# Altium PCB BenchTopPCB.PcbDoc
Units mil, origin at the board's own origin, x right, y up, seen from the top; angles counter-clockwise.
Board outline 3031.43 x 1027.42 mil, 2 copper layers (Top Layer, Bottom Layer), stack 61.8 mil thick; 20 components, 14 nets, 57 pads, 0 vias.
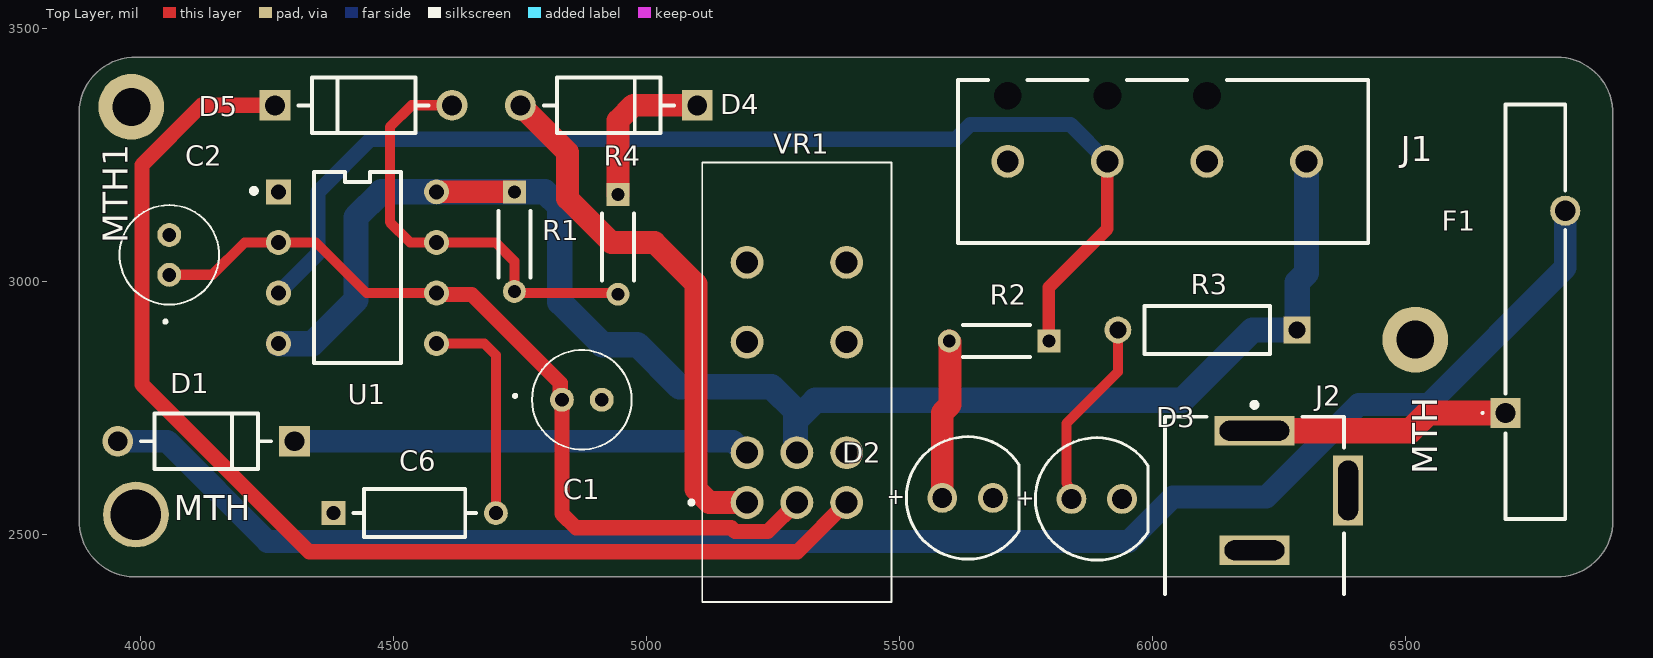
[diagram p0: Top Layer view]
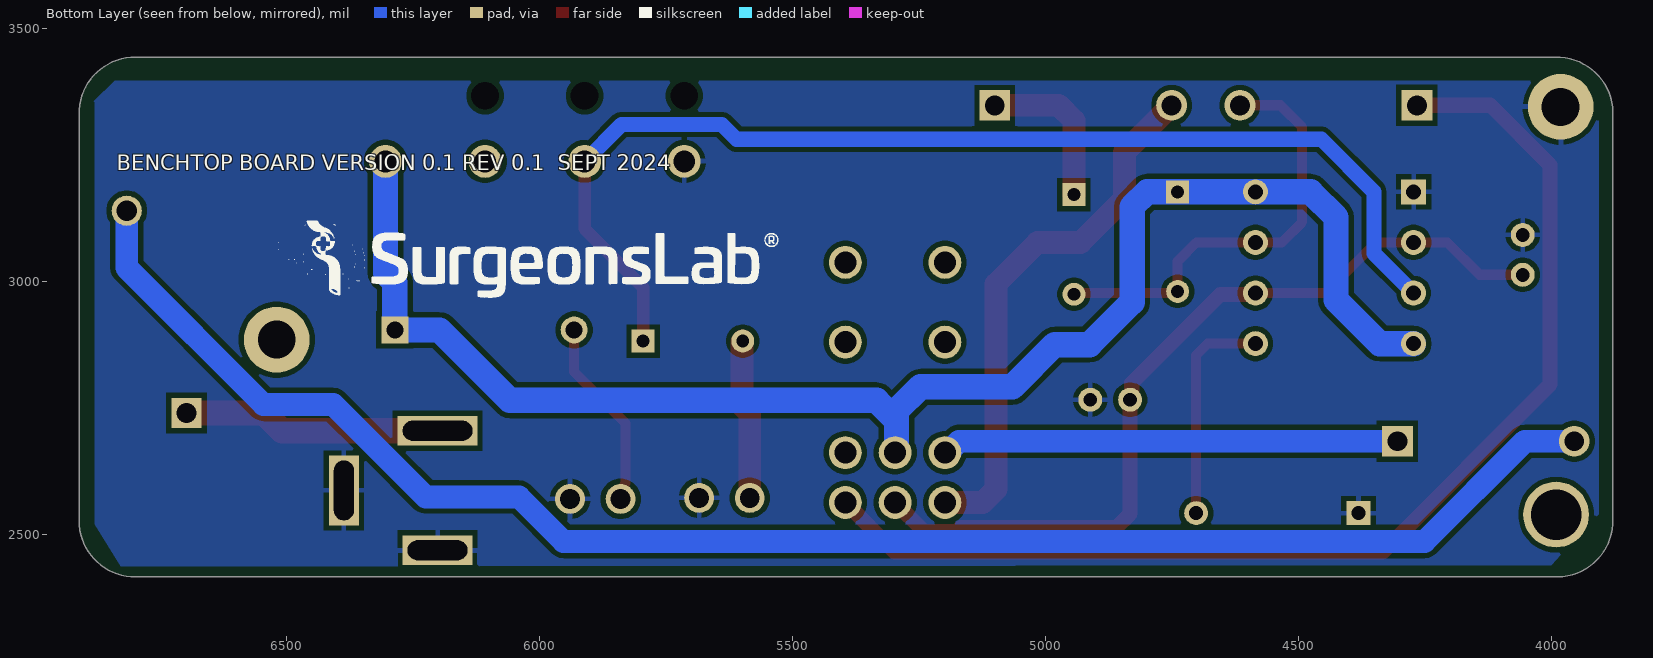
[diagram p1: Bottom Layer view, seen from below]
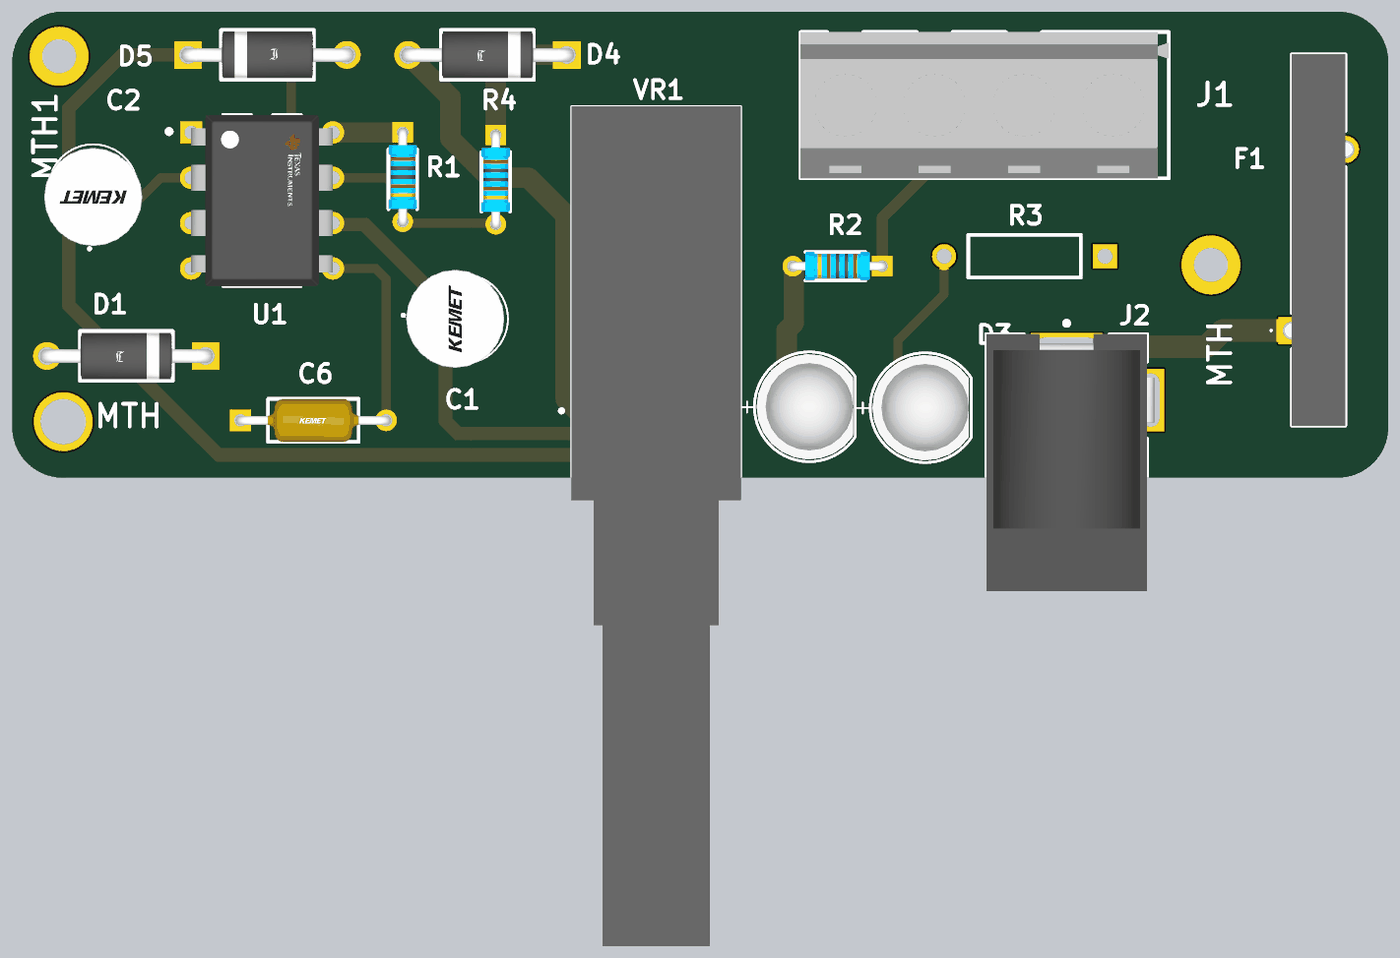
[diagram p2: 3D render of the assembled board from above, using the file's embedded part models]

## Layer stack, top to bottom
Top Solder: solder mask 0.4, SM-001, Dk 4
Top Layer: signal copper 1.4
Dielectric 1: dielectric 59, FR-4, Dk 4.8
Bottom Layer: signal copper 1.4
Bottom Solder: solder mask 0.4, SM-001, Dk 4

## Board outline
3879,2520.67 ccw(c3990,2528) 3997.18,2416.99 6807,2416.99 6808.23,2417.14 ccw(c6799,2528) 6910.25,2528 ccw(c6799,2528) 6910.02,2535.16 6910.02,3338.75 6910.16,3340.32 ccw(c6799.15,3332.99) 6808.24,3443.86 6806.09,3444.01 ccw(c6799.15,3332.99) 6792.22,3444.01 3983,3444.01 3982.67,3444 ccw(c3990,3333) 3878.99,3325.84

## Design rules (kind name [scope] priority, off if disabled: settings)
Clearance [All] p1: gap=10 ignorepadtopadclearanceinfootprint=FALSE
PolygonConnect [All] p1: connectstyle=Relief reliefconductorwidth=10 reliefentries=4 polygonreliefangle="90 Angle" airgapwidth=10
RoutingVias [All] p1: holewidth=28 width=50 viastyle="Through Hole" minholewidth=28 minwidth=50 maxholewidth=28 maxwidth=50
SMDNeckDown [All] p1: percent=50.000
SolderMaskExpansion [All] p1: expansion=4 istentingtop=FALSE
SupplyNets "Schematic Supply Nets_1" [InNet('+12')] p1: voltage=0.000
SupplyNets "Schematic Supply Nets" [InNet('GND')] p2: voltage=0.000
Width [All] p1: maxlimit=50 minlimit=10 preferedwidth=20
30 further rules are at their usual default settings.

## Classes and differential pairs
component class Schematic_Sheet_1: C1 C2 C6 D1 D2 D3 D4 D5 F1 J1 J2 R1 R2 R3 R4 U1 VR1

## Components (designator, comment, footprint, x,y, rotation, side; value= is the part's Value field where it differs from the comment)
C1 "ESH106M050AC3AA" ESH106M050AC3AA 4833,2767 r0 top
C2 "ESH106M050AC3AA" ESH106M050AC3AA 4057,3014 r90 top
C6 "0.01uF" FP-C410C104M5U5TA7200-MFG 4542,2543 r0 top
D1 "1N4007" FP-1N4007-MFG 4130,2685 r180 top value=15pF
D2 "151051VS04000" WL-TMRC_D5.9H8.7 5634.83,2573 r0 top value=150nF
D3 "151051RS11000" WL-TMRC_D5.9H8.7 5890,2571 r0 top
D4 "1N4007" FP-1N4007-MFG 4925.8,3349 r180 top value=15pF
D5 "1N4007" FP-1N4007-MFG 4441,3349 r0 top value=15pF
F1 "RXEF250-2" RXEF2502 6698,2741 r90 top
J1 "282836-4" 2828364 6304.7,3238.08 r180 top
J2 "PJ-002A" CUI-PJ-002A_V 6201.85,2587.76 r270 top locked
MTH "Comment" PCBComponent_1#1 3991,2540 r0 top
MTH "Comment" PCBComponent_1#2 6519.69,2885.83 r0 top
MTH1 "Comment" PCBComponent_1#2 3982,3346 r0 top
R1 "1K" FP-MRS1600-MFG 4739,3079.58 r270 top
R2 "270ohms" FP-MRS1600-MFG 5697,2883 r180 top
R3 "MFR-25FBF52-1K" RESA60-630X240 6109,2905 r180 top
R4 "12K" FP-MRS1600-MFG 4944,3074 r270 top
U1 "LM555CN/NOPB" FP-P0008A-MFG 4429,3028 r0 top
VR1 "PTM902-025K-503A2" PTM902025K503A2 5199,2662.43 r270 top locked

## Footprints (in the part's own frame and the unit in brackets; to place one, negate y for a bottom-side part, rotate by r counter-clockwise, add the part's x,y. Pads: shape width x height; smd on the part's side, far side on the other; paste and mask are expansions set on the pad)
2828364 [mm]
  round 1.65 hole 1.1: 1(0,0) 2(5,0) 3(10,0) 4(15,0)
  round 0.7 hole 1.4 unplated: MH1(5,-3.3) MH2(10,-3.3) MH3(15,-3.3)
  silkscreen extent -3.1,-4.1 17.5,4.1, body extent -3.1,-4.1 17.5,4.1, height 9.82
CUI-PJ-002A_V [mm] "THD, 3-Leads, Body 14.4x9mm, Height 11mm"
  rect 1.5x4 hole 1 slot 3.5 at 90 deg: 1(-3,0)
  rect 1.5x3.5 hole 1 slot 3 at 90 deg: 2(3,0)
  rect 3.5x1.5 hole 1 slot 3 at 0 deg: 3(0,4.7)
  silkscreen extent -4.42,-4.5 5.2,4.5, body extent -3.7,-4.5 10.7,4.9, height 11
ESH106M050AC3AA [mm]
  round 1.2 hole 0.7: 1(0,0) 2(2,0)
  silkscreen extent -2.4,-2.5 3.5,2.5, body extent -2.19,-2.75 3.29,2.75, height 12.5
FP-1N4007-MFG [mm]
  rect 1.55x1.55 hole 1 paste-2539.97 mask+0: 1(-4.44,0)
  round 1.55 hole 1 paste-2539.97 mask+0: 2(4.44,0)
  silkscreen extent -3.26,-1.4 3.26,1.4, body extent -5.32,-1.5 5.32,1.5, height 0.25
FP-C410C104M5U5TA7200-MFG [mm]
  rect 1.2x1.2 hole 0.7 paste-2539.97 mask+0: 1(-4.075,0)
  round 1.2 hole 0.7 paste-2539.97 mask+0: 2(4.075,0)
  silkscreen extent -3.08,-1.2 3.07,1.21, body extent -4.77,-1.31 4.77,1.31, height 0.25
FP-MRS1600-MFG [mm]
  rect 1.15x1.15 hole 0.65 paste-2539.97 mask+0: 1(-2.5,0)
  round 1.15 hole 0.65 paste-2539.97 mask+0: 2(2.5,0)
  silkscreen extent -1.55,-0.8 1.8,0.8, body extent -3.17,-0.9 3.17,0.9, height 0.25
FP-P0008A-MFG [mm]
  rect 1.25x1.25 hole 0.75 paste-2539.97 mask+0: 1(-3.97,3.81)
  round 1.25 hole 0.75 paste-2539.97 mask+0: 2(-3.97,1.27) 3(-3.97,-1.27) 4(-3.97,-3.81) 5(3.97,-3.81) 6(3.97,-1.27) 7(3.97,1.27) 8(3.97,3.81)
  silkscreen extent -5.32,-4.79 2.18,4.79, body extent -4.69,-5.18 4.69,5.18, height 0.25
PCBComponent_1#1 [mil]
  round 130 hole 100: 1(0,0)
PCBComponent_1#2 [mil]
  round 130 hole 75: 1(0,0)
PTM902025K503A2 [mm]
  round 1.65 hole 1.1: 1(2.5,0) 2(2.5,2.5) 3(2.5,5) 4(0,0) 5(0,2.5) 6(0,5) A1(-9.55,5) C1(-5.55,5) D1(-9.55,0) F1(-5.55,0)
  silkscreen extent -14.56,-2.9 7.5,7.25, body extent -14.56,-2.25 32.5,7.25, height 11.45
RESA60-630X240 [mm] "Axial Resistor, 2-Leads, Dia 2.4mm, Body Length 6.3mm"
  rect 1.35x1.35 hole 0.85: 1(-4.5,0)
  round 1.35 hole 0.85: 2(4.5,0)
  silkscreen extent -3.15,-1.2 3.15,1.2, body extent -3.15,-1.2 3.15,1.2, height 2.4
RXEF2502 [mm]
  rect 1.515x1.515 hole 1.01: 1(0,0)
  round 1.515 hole 1.01: 2(10.15,-3)
  silkscreen extent -5.33,-3 15.48,1.2, body extent -5.33,-3.4 15.48,0.4, height 25.5
WL-TMRC_D5.9H8.7 [mm] "THT Mono-color Round Color LED, 2-leads"
  round 1.5 hole 1: 1(-1.27,0) 2(1.27,0)
  silkscreen extent -3.07,-3.07 2.58,3.08, body extent -2.95,-2.95 2.45,2.95, height 9.2

## Part data
C1 C2: "Aluminium Electrolytic Capacitors - Radial Leaded 50V 10uF 105C 2k Hour Radial", Manufacturer_Name=KEMET, Mouser Part Number=80-ESH106M050AC3AA, Arrow Part Number=ESH106M050AC3AA, Arrow Price/Stock=https://www.arrow.com/en/products/esh106m050ac3aa/kemet-corporation?utm_currency=USD&region=nac, Datasheet Link=https://content.kemet.com/datasheets/KEM_A4005_ESH.pdf, Height=12.5mm, Manufacturer_Part_Number=ESH106M050AC3AA, Mouser Price/Stock=https://www.mouser.co.uk/ProductDetail/KEMET/ESH106M050AC3AA?qs=w9hhVRgtvfk%252BayNmSQobGw%3D%3D
C6: library part CMP-03020-034640-1, "CAP CER 0.1UF 50V Z5U AXIAL", Capacitance=100nF, Case/Package=Axial, Dielectric=Z5U, Max Operating Temperature=85°C, Min Operating Temperature=10°C, Package Quantity=5000, Tolerance=20%, Voltage Rating=50V, Construction=AXIAL, Dissipation Factor=4%, Lead Diameter=0.51mm, Lead Free="Lead Free", Lead Length=25.4mm, Length=4.32mm, Mount="Through Hole", Number of Pins=2, Packaging="Tape and Reel", Radiation Hardening=No, REACH SVHC="No SVHC", RoHS Compliant=Yes, Series="Aximax 400", Termination=Axial, Voltage Rating (DC)=50V
D1 D4 D5: library part CMP-123542-000001-1, "Rectifier diode 1000 V 1 A DO-41, ,", Capacitance=15pF, Forward Current=1A, Manufacturer=Diotec, Max Junction Temp=+175°C, Max Repetitive Reverse Voltage=1000V, Max Surge Forward Current=27A, Peak Reverse Current=5uA, Temperature="-50°C to +175°C", Temperature Range Low=-50°C, Automotive=No, Category=Diode, ComponentLink2Description=Datasheet, ComponentLink2URL=https://datasheet.octopart.com/1N4007-Diotec-datasheet-62346875.pdf, Device Class L1="Discrete Semiconductors", Device Class L2=Diodes, Device Class L3="Rectifier Diodes", Height=2.8mm, Ipc Land Pattern Name=DIOAD888W100L520D280, Lead Free=Yes, Manufacturer Part Number=1N4007, Octopart=https://octopart.com/1n4007-diotec-4040411, Package=1N4007, Reverse Voltage=1000V, RoHS=TRUE, Temperature Range High=+175°C
D2: library part CMP-1488-00007-2, Case/Package=Radial, Color=Green, Forward Current=100mA, Forward Voltage=2.1V, Manufacturer=Nichicon, Manufacturer Part Number=UKL1HR15KDDANA, Max Operating Temperature=85°C, Max Reverse Voltage (DC)=5V, Min Operating Temperature=-40°C, Package Quantity=200, Ripple Current=1.6mA, Supplier Part Number 1=493-15391-ND, Test Current=20mA, Tolerance=10%, Voltage Rating=50V, Category="Aluminum Electrolytic Capacitors", ComponentLink1Description=https://datasheet.ciiva.com/11688/e-kl-11688681.pdf?src-supplier=Avnet, ComponentLink1URL=https://datasheet.ciiva.com/11688/e-kl-11688681.pdf?src-supplier=Avnet, ComponentLink2Description=https://datasheet.ciiva.com/109/e-kl-109678.pdf?src-supplier=Digikey, ComponentLink2URL=https://datasheet.ciiva.com/109/e-kl-109678.pdf?src-supplier=Digikey, Diameter=5mm, Dominant Wavelength=572nm, Height=8.6mm, Height - Seated (Max)=0.472inch, Lead Pitch=0.079inch, Length=5mm, Lens Size=5mm, Lens Style="Circular, Diffused, Round", Life (Hours)=2000Hour, Luminous Intensity=140mcd, Mount="Through Hole", Mounting Technology="Through Hole", NexarPartId=29717814, Packaging=Bulk, Peak Wavelength=573nm, Pricing 1="1=0.29, 10=0.188, 50=0.1386, 100=0.1129, 500=0.08914, 2000=0.07131, 4000=0.06975 (USD)", Radiation Hardening=No, REACH SVHC=Unknown, RoHS=Compliant, RoHS Compliant=Yes, Series=UKL, Stock 1=3618, Supplier 1=Digikey, Termination=Radial, Viewing Angle=40°, Wavelength=572nm, Width=5mm
D3: library part CMP-1488-00008-2, Case/Package=Radial, Color=Red, Forward Current=100mA, Forward Voltage=2.1V, Max Operating Temperature=85°C, Max Reverse Voltage (DC)=5V, Min Operating Temperature=-40°C, Test Current=20mA, Dominant Wavelength=645nm, Height=8.6mm, Length=5mm, Lens Size=5mm, Lens Style="Circular, Diffused, Round", Luminous Intensity=30mcd, Mount="Through Hole", NexarPartId=29717813, Packaging=Bulk, Peak Wavelength=650nm, REACH SVHC=Unknown, RoHS=Compliant, Viewing Angle=60°, Wavelength=630nm, Width=5mm
F1: "Fuse", Manufacturer_Name=LITTELFUSE, Mouser Part Number=650-RXEF250-2, Arrow Part Number=RXEF250-2, Arrow Price/Stock=https://www.arrow.com/en/products/rxef250-2/littelfuse?region=nac, Datasheet Link=https://www.littelfuse.com/~/media/electronics/datasheets/resettable_ptcs/littelfuse_ptc_radial_leaded_rxef_datasheet.pdf.pdf, Height=25.4mm, Manufacturer_Part_Number=RXEF250-2, Mouser Price/Stock=https://www.mouser.co.uk/ProductDetail/Littelfuse/RXEF250-2?qs=k5V78Jg%2Feq5GsZ7NS1UD7A%3D%3D
J1: "Connector", Manufacturer_Name="TE Connectivity", Mouser Part Number=571-2828364, Arrow Part Number=282836-4, Arrow Price/Stock=https://www.arrow.com/en/products/282836-4/te-connectivity?region=europe, Datasheet Link=https://www.te.com/commerce/DocumentDelivery/DDEController?Action=srchrtrv&DocNm=1-1773458-1_EURO_STYLE_QRG&DocType=Data%20Sheet&DocLang=English&PartCntxt=282836-4&DocFormat=pdf, Height=10.2mm, Manufacturer_Part_Number=282836-4, Mouser Price/Stock=https://www.mouser.co.uk/ProductDetail/TE-Connectivity/282836-4?qs=A%252Bip%252BNCYi6ObENxJffNuog%3D%3D
J2: library part CMP-2000-06895-2, "Through Hole Right Angle DC Power Jack, 2.5 A, 2 mm Center Pin, 3 Position, -25 to 85 degC, RoHS, Bulk", Current Rating=2.5A, Flammability Rating=UL94V-0, Insulation Resistance=50MOhms, Manufacturer=CUIInc., Operating Temperature Range=-25Cto+85C, Package Description="3-Pin Through Hole Device, Body 14.4 x 9 mm, Height 11 mm", Voltage Rating=24V, Brand=CUI, Connector Type=DCPowerJack, Contact Gender=Male, Contact Material=Copper, Contact Plating=Nickel, Datasheet URL=http://www.cui.com/product/resource/pj-002a.pdf, Datasheet Version="Rev. 1.03, 04/2016", Factory Pack Quantity=500, Housing Material=PolybutyleneTerephthalate(PBT), Inside Contact Diameter=2mm, Manufacturer URL=http://www.cui.com/, Mounting Angle=Right, Mounting Style=ThroughHole, Mounting Technology=ThroughHole, Outside Contact Diameter=6.5mm, Package Reference=PJ-002A, Product=Jacks, Product Category=DCPowerConnectors, RoHS=True, Termination Style=ThroughHole
R1 R2 R4: library part CMP-02408-000019-1, "RES 20K OHM 0.4W 1% AXIAL", Case/Package=Conformal, Max Operating Temperature=155°C, Max Power Dissipation=400mW, Min Operating Temperature=-55°C, Resistance=20kR, Resistor Type="Metal Film", Temperature Coefficient=50ppm/°C, Tolerance=1%, Construction=Cylindrical, Contact Plating=Tin, Diameter=1.6mm, Length=3.6mm, Military Standard=Not, Mount="Through Hole", Number of Terminations=2, Packaging="Tape and Reel", Power Rating=400mW, Radiation Hardening=No, RoHS Compliant=Yes, Series=MRS16, Technology="THIN FILM", Termination=Axial
R3: library part CMP-1659-00075-1, "Axial Resistor, 1 KOhm, +/- 1%, 0.25W, -55 to 155 degC, 2-Pin THD, RoHS, Bulk", Case\Package=Axial, Max Operating Temperature="155 degC", Min Operating Temperature="-55 degC", Package Quantity=200, Power Rating="250 mW", Resistance="10 kohm", Tolerance=1%, Voltage Rating="250 V", ComponentLink1Description="Manufacturer URL", ComponentLink1URL=http://www.yageo.com/, ComponentLink2Description=Datasheet, ComponentLink2URL=http://www.yageo.com/documents/recent/Yageo%20LR_MFR_2013.pdf, DatasheetVersion=Apr-13, Length="0.248 inch", PackageDescription="2-Pin Axial Lead, Dia 2.4 mm, Body Length 6.3 mm", PackageReference=MFR-25, Packaging=Bulk, RoHSCompliant=true
U1: library part CMP-0056-00016-4, "IC OSC SINGLE TIMER 100KHZ 8-DIP", Ambient Temperature Range High=+70°C, Ambient Temperature Range Low=0°C, Manufacturer="Texas Instruments", Max Supply Voltage=16V, Min Supply Voltage=4.5V, Nominal Supply Current=3mA, Package=P0008A, Temperature="0°C to +70°C", Automotive=No, Category=IC, ComponentLink2Description=Datasheet, ComponentLink2URL=http://www.ti.com/lit/ds/symlink/lm555.pdf, Device Class L1="Integrated Circuits (ICs)", Device Class L2="Clock and Timing", Device Class L3="Timers and Oscillators", Digikey Description="IC OSC SINGLE TIMER 100KHZ 8-DIP", Height=5.08mm, Lead Free=Yes, Manufacturer Part Number=LM555CN/NOPB, Max Junction Temp=+70°C, Number Of Timers/Counters=1, Octopart=https://octopart.com/lm555cn%2Fnopb-texas+instruments-24814897, RoHS=TRUE, Standoff Height=0.51mm, Temperature Range High=+70°C, Temperature Range Low=0°C
VR1: "Variable Resistor", Manufacturer_Name=Bourns, Mouser Part Number=652-PTM902-025K503A2, Datasheet Link=https://www.mouser.com/datasheet/2/54/PTM90-777949.pdf, Height=11.35mm, Manufacturer_Part_Number=PTM902-025K-503A2, Mouser Price/Stock=https://www.mouser.co.uk/ProductDetail/Bourns/PTM902-025K-503A2?qs=U%2FacTlguYxY%252BH47tVYAt6w%3D%3D

## Nets (pads, with @x,y where several pads share a name; then routed paths per layer and width w, separated by ;. In a path a pad name is that pad's centre, name@x,y a point inside that pad or via, vN(x,y) a via of type N, cw(c..) or ccw(c..) an arc to the next point about the centre after c; other vN are vias at no path point)
+12: J1.1 R1.1 R3.1 U1.4 U1.8 VR1.5 | length 3168
  Top Layer w45: U1.8 R1.1
  Bottom Layer w50: U1.4 4340,2878 4426,2964 4426,3128 4476,3178 U1.8 R1.1 4799.71,3178 4829,3148.71 4829,2960 4913,2876 4982,2876 5065.28,2792.72 5247.28,2792.72 5294.56,2745.44 5294.56,2665.29 VR1.5 ; 5300.29,2732.29 5334,2766 6059,2766 6198,2905 R3.1 6286.17,2999.17 6304.7,3017.7 J1.1
GND: C1.2 C2.2 C6.1 D2.2 D3.2 J1.4 J2.2 J2.3 MTH1.1 U1.1
Motor_Signal: J1.3 R2.1 U1.3 | length 2280.7
  Top Layer w25: R2.1 5795.43,2989.43 5911,3105 J1.3
  Bottom Layer w30: U1.3 4351,3056.3 4351,3178 4455,3282 5611,3282 5640,3311 5838.08,3311 J1.3
NetC6_2: C6.2 U1.5 | length 439
  Top Layer w20: U1.5 4680,2878 4702.43,2855.57 C6.2
NetD1_2: D1.2 F1.2 | length 3279.7
  Bottom Layer w45: D1.2 3955.41,2684.79 4053.21,2684.79 4251.12,2486.88 5952.72,2486.88 6040.84,2575 6225.21,2575 6408,2757.79 6545.79,2757.79 6816.11,3028.11 F1.2
NetD2_1: D2.1 R2.2 | length 317.1
  Top Layer w45: D2.1 5584.84,2741.5 5600.34,2757 5600.34,2881.16 5598.58,2882.93 R2.2
NetD3_1: D3.1 R3.2 | length 380.3
  Top Layer w20: D3.1 5832.53,2578.48 5832.53,2599.72 5830,2602.25 5830,2720 5931.83,2821.83 R3.2
NetD4_1: D4.1 R4.1 | length 315.6
  Top Layer w45: R4.1 4944,3319 4974,3349 D4.1
NetD5_2: D5.2 R1.2 R4.2 U1.7 | length 873.7
  Top Layer w20: D5.2 4536,3349 4493,3306 4493,3118 4533,3078 4702,3078 4739,3041 R1.2 4741.79,2978.36 4941.21,2978.36 R4.2
NetF1_1: F1.1 J2.1 | length 510.7
  Top Layer w50: J2.1 6510,2705.87 6545.13,2741 F1.1
NetLabel2: D1.1 VR1.4 | length 903.5
  Bottom Layer w45: D1.1 5171.02,2685 5193.6,2662.43 VR1.4
POT_SIGNAL: C1.1 C2.1 U1.2 U1.6 VR1.2 | length 1677.1
  Top Layer w20: C2.1 4142,3014 4206,3078 U1.2 4347,3078 4447,2978 U1.6
  Top Layer w30: U1.6 4588.2,2975.1 4654.9,2975.1 4829.7,2800.3 4829.7,2770.3 C1.1 4833,2541.57 4860.57,2514 5167.71,2514 5175.19,2506.52 5239.94,2506.52 VR1.2
R1_CCW: D4.2 VR1.1 | length 1064.1
  Top Layer w45: D4.2 4844,3256 4844,3165 4931,3078 5016,3078 5098,2996 5098,2590.36 5124.36,2564 VR1.1
R1_CW: D5.1 VR1.3 | length 2316.2
  Top Layer w30: D5.1 4121,3349 4003,3231 4003,2797 4333.48,2466.52 5298.37,2466.52 VR1.3
pads on no net: J1.2 J1.MH1 J1.MH2 J1.MH3 MTH.1 VR1.6 VR1.A1 VR1.C1 VR1.D1 VR1.F1

## Polygon pours and split planes (outlines as drawn)
GND on Bottom Layer "GND_L02_P001" (solid, pour order 1): 3942,3396 4001,3398 6840,3398 6881,3357 6879,3355 6879,2521 6827.54,2437.53 4001,2440 3907,2541 3907,3367 3908,3368

## Silkscreen, mask and mechanical layers (free items; w line width, h text height)
Bottom Overlay:
  drawing of 60 lines, arcs and shapes, not listed
  text "BENCHTOP BOARD VERSION 0.1 REV 0.1  SEPT 2024" at 6836,3221 h30
Mechanical 1:
  lines w10: 3884,3326 cw(c3990,3333) 3983,3439 6807,3439 ; 3884,3340 3884,2521 ccw(c3990,2528) 3997,2422 ; 3985,2422 6807,2422 ; 6792.15,3438.99 cw(c6799.15,3332.99) 6905.15,3339.99 ; 6806,2422 ccw(c6799,2528) 6905,2535 6905,3341
Top 3D Body:
  circle w0.5: c5702.76,3200.79 r38.39
  circle w0.5: c5331.69,2264.37 r33.27
  circle w0.5: c5331.69,2564.37 r33.27
  circle w0.5: c5331.69,2664.37 r33.27
  circle w0.5: c6120,3112.95 r22.64
  circle w0.5: c6280,3102.95 r22.64
  circle w0.5: c5366.14,2830.71 r37.29
  circle w0.5: c5812.01,2951.77 r32.48
  circle w0.5: c6519.69,2885.83 r90
  circle w0.5: c5262.8,3005.91 r90
  lines w0.5: 5331.69,2464.37 5261.63,2464.37 5214,2512 5214,2801.57 5237.43,2825 5360.43,2825 5366.14,2830.71 ; 5504.92,2951.77 5504.92,3045.57 5528.35,3069 5860,3069 5899.61,3108.61 5899.61,3200.79 6256.57,3200.79 6280,3177.36 6280,3102.95 ; 5765.75,2775.59 5765.75,2786.3 5812.01,2832.56 5812.01,2951.77 ; 5845.67,2705.67 5913,2773 6256.57,2773 6280,2796.43 6280,2847.05 ; 6259.84,2459.65 ccw(c6228.35,2459.65) 6228.35,2491.14 6165.35,2491.14 ccw(c6165.35,2459.65) 6133.86,2459.65 ccw(c6165.35,2459.65) 6165.35,2428.15 6228.35,2428.15 ccw(c6228.35,2459.65) 6259.84,2459.65 ; 6259.84,2459.65 6259.84,2459.65 ; 5298.43,2431.1 5298.43,2497.64 5364.96,2497.64 5364.96,2431.1 5298.43,2431.1 ; 5861.22,3181.59 ccw(c5880.41,3181.59) 5880.41,3162.4 5918.8,3162.4 ccw(c5918.8,3181.59) 5937.99,3181.59 5937.99,3219.98 ccw(c5918.8,3219.98) 5918.8,3239.17 5880.41,3239.17 ccw(c5880.41,3219.98) 5861.22,3219.98 5861.22,3181.59 ; 6097.36,2834.41 6142.64,2834.41 6142.64,2879.68 6097.36,2879.68 6097.36,2834.41 ; 6133.86,2664.37 6133.86,2727.36 6259.84,2727.36 6259.84,2664.37 6133.86,2664.37 ; 6257.36,2824.41 6302.64,2824.41 6302.64,2869.68 6257.36,2869.68 6257.36,2824.41 ; 6350.39,2546.26 ccw(c6381.89,2546.26) 6381.89,2514.76 ccw(c6381.89,2546.26) 6413.39,2546.26 6413.39,2609.25 ccw(c6381.89,2609.25) 6381.89,2640.75 ccw(c6381.89,2609.25) 6350.39,2609.25 6350.39,2546.26
Top Courtyard:
  drawing of 249 lines, arcs and shapes, not listed
Top Designator:
  lines w0.5: 5110,2610 ccw(c5330,2590) 5144.62,2469.86 5225,2389.48 5226,2386.94 5226,2286.02 ; 5226.24,2303.52 ccw(c5311.38,2296.14) 5304,2211 ; 5234.25,3380.91 6331.42,3380.91 ; 5306.13,2211 5353.38,2211 ; 5351.41,2210.65 ccw(c5346.53,2301.12) 5437,2306 ; 5437,2307 5437,2352 ; 5437,2353 cw(c5508.25,2341.75) 5497,2413 ; 6332.83,3380.91 cw(c6327.83,3260.91) 6447.83,3255.91 ; 6448,3126 ccw(c6507.14,3131.47) 6497.16,3072.92 ; 6448.11,3126.97 6448.11,3272
Top Assembly:
  lines w0.5: 5205.31,1694.29 5458.07,1694.29 5458.07,2701.57 5205.31,2701.57 5205.31,1694.29 ; 5399.61,3029.53 6029.53,3029.53 6029.53,3372.05 5399.61,3372.05 5399.61,3029.53 ; 6011.81,2148.62 6417.32,2148.62 6417.32,2731.3 6011.81,2731.3 6011.81,2148.62 ; 6079.65,2830.47 6079.65,3139.53 6160.35,3139.53 6160.35,2830.47 6079.65,2830.47 ; 6239.65,2820.47 6239.65,3129.53 6320.35,3129.53 6320.35,2820.47 6239.65,2820.47
Bottom Designator:
  lines w0.5: 5156.5,2744.09 5156.5,2862.2 5975.39,2862.2 5975.39,2744.09 ; 5565.95,2905.54 5750.99,2905.54 5750.99,2998.01 5565.95,2998.01 5565.95,2905.54
Mechanical 7:
  lines w0.5: 5146.65,2734.25 5146.65,2872.05 5985.24,2872.05 5985.24,2734.25 ; 5638.78,2951.77 5678.15,2951.77 ; 5658.46,2932.09 5658.46,2971.46
Mechanical 8:
  lines w0.5: 5205.31,2099.41 5458.07,2099.41 ; 5209.25,1698.23 5454.13,1698.23 5454.13,2465.55 5209.25,2465.55 5209.25,1698.23 ; 5407.48,3037.4 5998.03,3037.4 5998.03,3066.93 6021.65,3062.01 6021.65,3087.6 5998.03,3082.68 5998.03,3318.9 6021.65,3313.98 6021.65,3339.57 5998.03,3334.65 5998.03,3364.17 5407.48,3364.17 5407.48,3037.4 ; 6015.75,2152.56 6377.95,2152.56 6377.95,2727.36 6015.75,2727.36 6015.75,2152.56 ; 6083.58,2916.1 6083.58,3053.9 6156.42,3053.9 6156.42,2916.1 6083.58,2916.1 ; 6243.58,2906.1 6243.58,3043.9 6316.42,3043.9 6316.42,2906.1 6243.58,2906.1
Mechanical 9:
  lines w0.5: 5205.31,1694.29 5458.07,1694.29 5458.07,2701.57 5205.31,2701.57 5205.31,1694.29 ; 6011.81,2148.62 6417.32,2148.62 6417.32,2731.3 6011.81,2731.3 6011.81,2148.62 ; 6079.65,2830.47 6079.65,3139.53 6160.35,3139.53 6160.35,2830.47 6079.65,2830.47 ; 6239.65,2820.47 6239.65,3129.53 6320.35,3129.53 6320.35,2820.47 6239.65,2820.47
  text "R1" at 6120,2985 h39.37 r90
  text "R2" at 6280,2975 h39.37 r90
  text "J1" at 6185.91,2574.55 h39.37
  text "SW1" at 5301.69,2349.79 h39.37
Mechanical 10:
  lines w0.5: 5312.01,2081.89 5351.38,2081.89 ; 5331.69,2062.2 5331.69,2101.57 ; 5683.07,3200.79 5722.44,3200.79 ; 5702.76,3181.1 5702.76,3220.47 ; 6100.31,2985 6139.69,2985 ; 6120,2965.32 6120,3004.68 ; 6136.02,2439.96 6257.68,2439.96 ; 6196.85,2379.13 6196.85,2500.79 ; 6260.31,2975 6299.69,2975 ; 6280,2955.32 6280,2994.68
Top Component Outline:
  lines w0.5: 5407.48,3037.4 5407.48,3364.17 5998.03,3364.17 5998.03,3334.65 6021.65,3339.57 6021.65,3313.98 5998.03,3318.9 5998.03,3082.68 6021.65,3087.6 6021.65,3062.01 5998.03,3066.93 5998.03,3037.4 5407.48,3037.4
Mechanical 13:
  circle w0.5: c6196.85,2750 r4.92
  circle w0.5: c5157.48,2465.75 r4.92
  lines w0.5: 5156.5,2744.09 5156.5,2862.2 5319.88,2862.2 ; 5283.66,2465.55 5209.25,2465.55 5209.25,1698.23 5454.13,1698.23 5454.13,2465.55 5379.72,2465.55 ; 5408.46,2862.2 5975.39,2862.2 5975.39,2744.09 ; 5723.46,2898.62 5723.46,3004.92 ; 5760.83,2898.62 5760.83,3004.92 ; 5782.68,2545.28 5802.36,2545.28 ; 5792.52,2535.43 5792.52,2555.12 ; 6119.09,2727.36 6015.75,2727.36 6015.75,2152.56 6377.95,2152.56 6377.95,2500 ; 6120,2895.43 6120,2916.1 ; 6120,3053.9 6120,3074.57 ; 6274.61,2727.36 6377.95,2727.36 6377.95,2655.51 ; 6280,2885.43 6280,2906.1 ; 6280,3043.9 6280,3064.57 ; 5407.48,3037.4 5998.03,3037.4 5998.03,3066.93 6021.65,3062.01 6021.65,3087.6 5998.03,3082.68 5998.03,3318.9 6021.65,3313.98 6021.65,3339.57 5998.03,3334.65 5998.03,3364.17 5407.48,3364.17 5407.48,3037.4 ; 6083.58,2916.1 6083.58,3053.9 6156.42,3053.9 6156.42,2916.1 6083.58,2916.1 ; 6243.58,2906.1 6243.58,3043.9 6316.42,3043.9 6316.42,2906.1 6243.58,2906.1
  text "R1" at 6097.43,3160 h40
  text "R2" at 6248.86,3155 h40
  text "J2" at 5327.01,3124 h40
  text "D2" at 5428.46,2926.54 h40 r90
  text "F1" at 5933.58,2898 h40
  text "J1" at 6362.43,2764.65 h40
  text "SW1" at 5180.43,2554.78 h40 r90
Mechanical 14:
  drawing of 215 lines, arcs and shapes, not listed
  text "Symbol" at 6853.41,5217.33 h72
  text "Count" at 7359.28,5217.33 h72
  text "Hole Size" at 7899.14,5217.33 h72
  text "Plated" at 9048.81,5217.33 h72
  text "Hole Type" at 9554.68,5217.33 h72
  text "Drill Layer Pair" at 10288.48,5217.33 h72
  text "Via/Pad" at 11788.03,5217.33 h72
  text "Pad Shape" at 12377.88,5217.33 h72
  text "Template" at 13467.57,5217.33 h72
  text "Description" at 15267.02,5217.33 h72
  text "Hole Tolerance (+)" at 16120.78,5217.33 h72
  text "Hole Tolerance (-)" at 17454.39,5217.33 h72
  text "Hole Length" at 18788,5217.33 h72
  text "Routed Path Length" at 19937.66,5217.33 h72
  text "1" at 7359.28,5067.33 h60
  text "2.600mm (102.36mil)" at 7899.14,5067.33 h60
  text "PTH" at 9048.81,5067.33 h60
  text "Slot" at 9554.68,5067.33 h60
  text "Top Layer - Bottom Layer" at 10288.48,5067.33 h60
  text "Pad" at 11788.03,5067.33 h60
  text "Rounded Rectangle" at 12377.88,5067.33 h60
  text "r160_320h260_100r80m160_320p0" at 13467.57,5067.33 h60
  text "1.000mm (39.37mil)" at 18788,5067.33 h60
  text "-1.600mm (-62.99mil)" at 19937.66,5067.33 h60
  text "2" at 7359.28,4917.33 h60
  text "0.900mm (35.43mil)" at 7899.14,4917.33 h60
  text "PTH" at 9048.81,4917.33 h60
  text "Round" at 9554.68,4917.33 h60
  text "Top Layer - Bottom Layer" at 10288.48,4917.33 h60
  text "Pad" at 11788.03,4917.33 h60
  text "(Mixed)" at 12377.88,4917.33 h60
  text "(Mixed)" at 13467.57,4917.33 h60
  text "-" at 18788,4917.33 h60
  text "-" at 19937.66,4917.33 h60
  text "2" at 7359.28,4767.33 h60
  text "1.000mm (39.37mil)" at 7899.14,4767.33 h60
  text "PTH" at 9048.81,4767.33 h60
  text "Slot" at 9554.68,4767.33 h60
  text "Top Layer - Bottom Layer" at 10288.48,4767.33 h60
  text "Pad" at 11788.03,4767.33 h60
  text "(Mixed)" at 12377.88,4767.33 h60
  text "(Mixed)" at 13467.57,4767.33 h60
  text "2.600mm (102.36mil)" at 18788,4767.33 h60
  text "1.600mm (62.99mil)" at 19937.66,4767.33 h60
  text "2" at 7359.28,4617.33 h60
  text "1.050mm (41.34mil)" at 7899.14,4617.33 h60
  text "PTH" at 9048.81,4617.33 h60
  text "Round" at 9554.68,4617.33 h60
  text "Top Layer - Bottom Layer" at 10288.48,4617.33 h60
  text "Pad" at 11788.03,4617.33 h60
  text "(Mixed)" at 12377.88,4617.33 h60
  text "(Mixed)" at 13467.57,4617.33 h60
  text "-" at 18788,4617.33 h60
  text "-" at 19937.66,4617.33 h60
  text "2" at 7359.28,4467.33 h60
  text "1.150mm (45.28mil)" at 7899.14,4467.33 h60
  text "PTH" at 9048.81,4467.33 h60
  text "Round" at 9554.68,4467.33 h60
  text "Top Layer - Bottom Layer" at 10288.48,4467.33 h60
  text "Pad" at 11788.03,4467.33 h60
  text "Rounded" at 12377.88,4467.33 h60
  text "c165h115" at 13467.57,4467.33 h60
  text "-" at 18788,4467.33 h60
  text "-" at 19937.66,4467.33 h60
  text "2" at 7359.28,4317.33 h60
  text "1.263mm (49.72mil)" at 7899.14,4317.33 h60
  text "PTH" at 9048.81,4317.33 h60
  text "Round" at 9554.68,4317.33 h60
  text "Top Layer - Bottom Layer" at 10288.48,4317.33 h60
  text "Pad" at 11788.03,4317.33 h60
  text "Rounded" at 12377.88,4317.33 h60
  text "c189h126" at 13467.57,4317.33 h60
  text "-" at 18788,4317.33 h60
  text "-" at 19937.66,4317.33 h60
  text "2" at 7359.28,4167.33 h60
  text "2.032mm (80.00mil)" at 7899.14,4167.33 h60
  text "PTH" at 9048.81,4167.33 h60
  text "Round" at 9554.68,4167.33 h60
  text "Top Layer - Bottom Layer" at 10288.48,4167.33 h60
  text "Via" at 11788.03,4167.33 h60
  text "Rounded" at 12377.88,4167.33 h60
  text "v457h203" at 13467.57,4167.33 h60
  text "-" at 18788,4167.33 h60
  text "-" at 19937.66,4167.33 h60
  text "3" at 7359.28,4017.33 h60
  text "1.300mm (51.18mil)" at 7899.14,4017.33 h60
  text "PTH" at 9048.81,4017.33 h60
  text "Round" at 9554.68,4017.33 h60
  text "Top Layer - Bottom Layer" at 10288.48,4017.33 h60
  text "Pad" at 11788.03,4017.33 h60
  text "(Mixed)" at 12377.88,4017.33 h60
  text "(Mixed)" at 13467.57,4017.33 h60
  text "-" at 18788,4017.33 h60
  text "-" at 19937.66,4017.33 h60
  text "4" at 7359.28,3867.33 h60
  text "0.650mm (25.59mil)" at 7899.14,3867.33 h60
  text "PTH" at 9048.81,3867.33 h60
  text "Round" at 9554.68,3867.33 h60
  text "Top Layer - Bottom Layer" at 10288.48,3867.33 h60
  text "Pad" at 11788.03,3867.33 h60
  text "(Mixed)" at 12377.88,3867.33 h60
  text "(Mixed)" at 13467.57,3867.33 h60
  text "-" at 18788,3867.33 h60
  text "-" at 19937.66,3867.33 h60
  text "4" at 7359.28,3717.33 h60
  text "1.090mm (42.91mil)" at 7899.14,3717.33 h60
  text "PTH" at 9048.81,3717.33 h60
  text "Round" at 9554.68,3717.33 h60
  text "Top Layer - Bottom Layer" at 10288.48,3717.33 h60
  text "Pad" at 11788.03,3717.33 h60
  text "(Mixed)" at 12377.88,3717.33 h60
  text "(Mixed)" at 13467.57,3717.33 h60
  text "-" at 18788,3717.33 h60
  text "-" at 19937.66,3717.33 h60
  text "24 Total" at 7359.28,3567.33 h60
  text "Routed Path Length" at 7886.09,3422.35 h60
  text "= Calculated from tool start centre position to tool end centre position." at 8988.76,3422.35 h60
  text "Hole Length" at 7886.09,3322.38 h60
  text "= Routed Path Length + Tool Size = Slot length as defined in the PCB layout" at 8578.89,3322.38 h60
  text "Slot definitions :" at 7947.5,3204.5 h60
Mechanical 15:
  circle w0.5: c5702.76,3200.79 r38.39
  circle w0.5: c5331.69,2264.37 r33.27
  circle w0.5: c5331.69,2564.37 r33.27
  circle w0.5: c5331.69,2664.37 r33.27
  circle w0.5: c6120,3112.95 r22.64
  circle w0.5: c6280,3102.95 r22.64
  circle w0.5: c5366.14,2830.71 r37.29
  circle w0.5: c5812.01,2951.77 r32.48
  lines w0.5: 6259.84,2459.65 ccw(c6228.35,2459.65) 6228.35,2491.14 6165.35,2491.14 ccw(c6165.35,2459.65) 6133.86,2459.65 ccw(c6165.35,2459.65) 6165.35,2428.15 6228.35,2428.15 ccw(c6228.35,2459.65) 6259.84,2459.65 ; 6259.84,2459.65 6259.84,2459.65 ; 5298.43,2431.1 5298.43,2497.64 5364.96,2497.64 5364.96,2431.1 5298.43,2431.1 ; 5861.22,3181.59 ccw(c5880.41,3181.59) 5880.41,3162.4 5918.8,3162.4 ccw(c5918.8,3181.59) 5937.99,3181.59 5937.99,3219.98 ccw(c5918.8,3219.98) 5918.8,3239.17 5880.41,3239.17 ccw(c5880.41,3219.98) 5861.22,3219.98 5861.22,3181.59 ; 6097.36,2834.41 6142.64,2834.41 6142.64,2879.68 6097.36,2879.68 6097.36,2834.41 ; 6133.86,2664.37 6133.86,2727.36 6259.84,2727.36 6259.84,2664.37 6133.86,2664.37 ; 6257.36,2824.41 6302.64,2824.41 6302.64,2869.68 6257.36,2869.68 6257.36,2824.41 ; 6350.39,2546.26 ccw(c6381.89,2546.26) 6381.89,2514.76 ccw(c6381.89,2546.26) 6413.39,2546.26 6413.39,2609.25 ccw(c6381.89,2609.25) 6381.89,2640.75 ccw(c6381.89,2609.25) 6350.39,2609.25 6350.39,2546.26
Top Component Center:
  drawing of 191 lines, arcs and shapes, not listed
  text "Layer" at 6818.09,6318.99 h60
  text "Name" at 7228,6318.99 h60
  text "Material" at 8157.74,6318.99 h60
  text "Thickness" at 9017.51,6318.99 h60
  text "Constant" at 9667.35,6318.99 h60
  text "Board Layer Stack" at 10237.21,6318.99 h60
  text "Top Overlay" at 7228,6198.99 h60
  text "Top Solder" at 7228,6078.99 h60
  text "Solder Resist" at 8157.74,6078.99 h60
  text "0.40mil" at 9017.51,6078.99 h60
  text "3.5" at 9667.35,6078.99 h60
  text "1" at 6818.09,5958.99 h60
  text "Top Layer" at 7228,5958.99 h60
  text "1.38mil" at 9017.51,5958.99 h60
  text "Dielectric 1" at 7228,5838.99 h60
  text "FR-4" at 8157.74,5838.99 h60
  text "59.00mil" at 9017.51,5838.99 h60
  text "4.8" at 9667.35,5838.99 h60
  text "2" at 6818.09,5718.99 h60
  text "Bottom Layer" at 7228,5718.99 h60
  text "1.38mil" at 9017.51,5718.99 h60
  text "Bottom Solder" at 7228,5598.99 h60
  text "Solder Resist" at 8157.74,5598.99 h60
  text "0.40mil" at 9017.51,5598.99 h60
  text "3.5" at 9667.35,5598.99 h60
  text "Bottom Overlay" at 7228,5478.99 h60
  text "Total board thickness:" at 6818.09,5358.99 h60
  text "62.56mil" at 9017.51,5358.99 h60
Mechanical 19:
  circle w0.5: c5702.76,3200.79 r42.39
  circle w0.5: c5331.69,2264.37 r33.27
  circle w0.5: c5331.69,2564.37 r33.27
  circle w0.5: c5331.69,2664.37 r33.27
  circle w0.5: c6120,3112.95 r22.64
  circle w0.5: c6280,3102.95 r22.64
  circle w0.5: c5366.14,2830.71 r41.29
  circle w0.5: c5812.01,2951.77 r36.48
  circle w0.5: c6519.69,2885.83 r94
  circle w0.5: c5262.8,3005.91 r94
  lines w0.5: 6259.84,2459.65 ccw(c6228.35,2459.65) 6228.35,2491.14 6165.35,2491.14 ccw(c6165.35,2459.65) 6133.86,2459.65 ccw(c6165.35,2459.65) 6165.35,2428.15 6228.35,2428.15 ccw(c6228.35,2459.65) 6259.84,2459.65 ; 6259.84,2459.65 6259.84,2459.65 ; 5298.43,2431.1 5298.43,2497.64 5364.96,2497.64 5364.96,2431.1 5298.43,2431.1 ; 5857.22,3181.59 ccw(c5880.41,3181.59) 5880.41,3158.4 5918.8,3158.4 ccw(c5918.8,3181.59) 5941.99,3181.59 5941.99,3219.98 ccw(c5918.8,3219.98) 5918.8,3243.17 5880.41,3243.17 ccw(c5880.41,3219.98) 5857.22,3219.98 5857.22,3181.59 ; 6097.36,2834.41 6142.64,2834.41 6142.64,2879.68 6097.36,2879.68 6097.36,2834.41 ; 6133.86,2664.37 6133.86,2727.36 6259.84,2727.36 6259.84,2664.37 6133.86,2664.37 ; 6257.36,2824.41 6302.64,2824.41 6302.64,2869.68 6257.36,2869.68 6257.36,2824.41 ; 6350.39,2546.26 ccw(c6381.89,2546.26) 6381.89,2514.76 ccw(c6381.89,2546.26) 6413.39,2546.26 6413.39,2609.25 ccw(c6381.89,2609.25) 6381.89,2640.75 ccw(c6381.89,2609.25) 6350.39,2609.25 6350.39,2546.26
Bottom Assembly:
  circle w0.5: c5702.76,3200.79 r42.39
  circle w0.5: c5331.69,2264.37 r33.27
  circle w0.5: c5331.69,2564.37 r33.27
  circle w0.5: c5331.69,2664.37 r33.27
  circle w0.5: c6120,3112.95 r22.64
  circle w0.5: c6280,3102.95 r22.64
  circle w0.5: c5366.14,2830.71 r41.29
  circle w0.5: c5812.01,2951.77 r36.48
  circle w0.5: c5262.8,3005.91 r94
  lines w0.5: 6259.84,2459.65 ccw(c6228.35,2459.65) 6228.35,2491.14 6165.35,2491.14 ccw(c6165.35,2459.65) 6133.86,2459.65 ccw(c6165.35,2459.65) 6165.35,2428.15 6228.35,2428.15 ccw(c6228.35,2459.65) 6259.84,2459.65 ; 6259.84,2459.65 6259.84,2459.65 ; 5298.43,2431.1 5298.43,2497.64 5364.96,2497.64 5364.96,2431.1 5298.43,2431.1 ; 5857.22,3181.59 ccw(c5880.41,3181.59) 5880.41,3158.4 5918.8,3158.4 ccw(c5918.8,3181.59) 5941.99,3181.59 5941.99,3219.98 ccw(c5918.8,3219.98) 5918.8,3243.17 5880.41,3243.17 ccw(c5880.41,3219.98) 5857.22,3219.98 5857.22,3181.59 ; 6097.36,2834.41 6142.64,2834.41 6142.64,2879.68 6097.36,2879.68 6097.36,2834.41 ; 6133.86,2664.37 6133.86,2727.36 6259.84,2727.36 6259.84,2664.37 6133.86,2664.37 ; 6257.36,2824.41 6302.64,2824.41 6302.64,2869.68 6257.36,2869.68 6257.36,2824.41 ; 6350.39,2546.26 ccw(c6381.89,2546.26) 6381.89,2514.76 ccw(c6381.89,2546.26) 6413.39,2546.26 6413.39,2609.25 ccw(c6381.89,2609.25) 6381.89,2640.75 ccw(c6381.89,2609.25) 6350.39,2609.25 6350.39,2546.26
Bottom Courtyard:
  circle w0.5: c5702.76,3200.79 r25.59
  circle w0.5: c5899.61,3200.79 r25.59
  circle w0.5: c5331.69,2264.37 r21.46
  circle w0.5: c5331.69,2464.37 r21.46
  circle w0.5: c5331.69,2564.37 r21.46
  circle w0.5: c5331.69,2664.37 r21.46
  circle w0.5: c6120,2857.05 r12.8
  circle w0.5: c6120,3112.95 r12.8
  circle w0.5: c6280,2847.05 r12.8
  circle w0.5: c6280,3102.95 r12.8
  circle w0.5: c5366.14,2830.71 r24.86
  circle w0.5: c5812.01,2951.77 r22.64
  lines w0.5: 6165.35,2439.96 cw(c6165.35,2459.65) 6165.35,2479.33 6228.35,2479.33 cw(c6228.35,2459.65) 6228.35,2439.96 6165.35,2439.96 ; 6165.35,2676.18 cw(c6165.35,2695.87) 6165.35,2715.55 6228.35,2715.55 cw(c6228.35,2695.87) 6228.35,2676.18 6165.35,2676.18 ; 6362.2,2546.26 ccw(c6381.89,2546.26) 6401.57,2546.26 6401.57,2609.25 ccw(c6381.89,2609.25) 6362.2,2609.25 6362.2,2546.26
Mechanical 22:
  circle w0.5: c6519.69,2885.83 r40
  circle w0.5: c5262.8,3005.91 r40

## Text inside footprints (layer, text, board x,y; h text height)
D2: Top Overlay "+" at 5475.38,2560.01 h31.5
D3: Top Overlay "+" at 5730.55,2558.01 h31.5